# Altium PCB circuit_pcb.PcbDoc
Units mm, origin at the board's own origin, x right, y up, seen from the top; angles counter-clockwise.
Board outline 64.75 x 28.13 mm, 2 copper layers (Top Layer, Bottom Layer); 18 components, 158 nets, 67 pads, 22 vias.
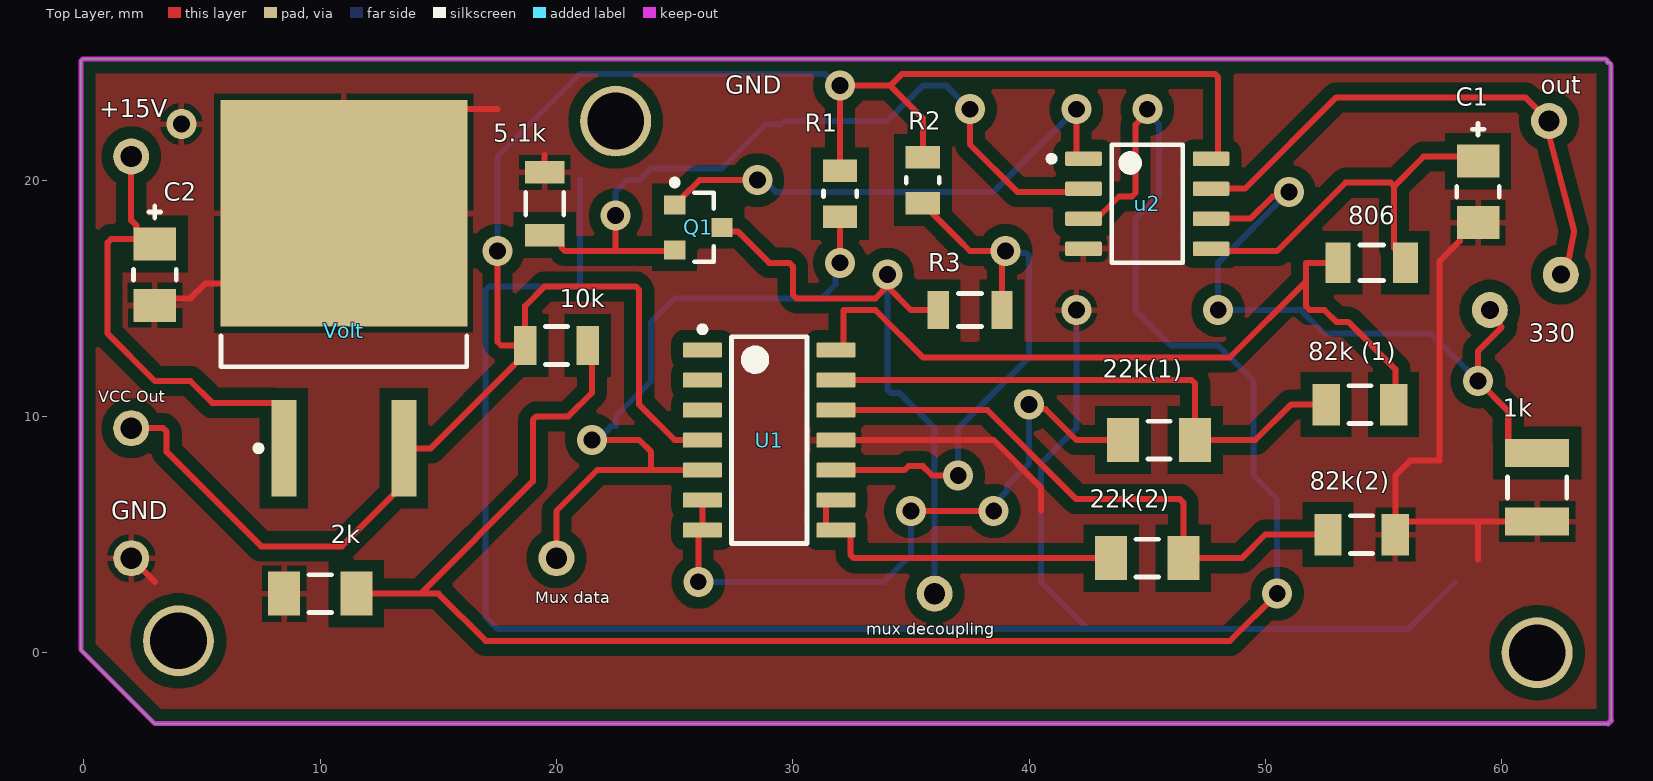
[diagram p0: Top Layer view]
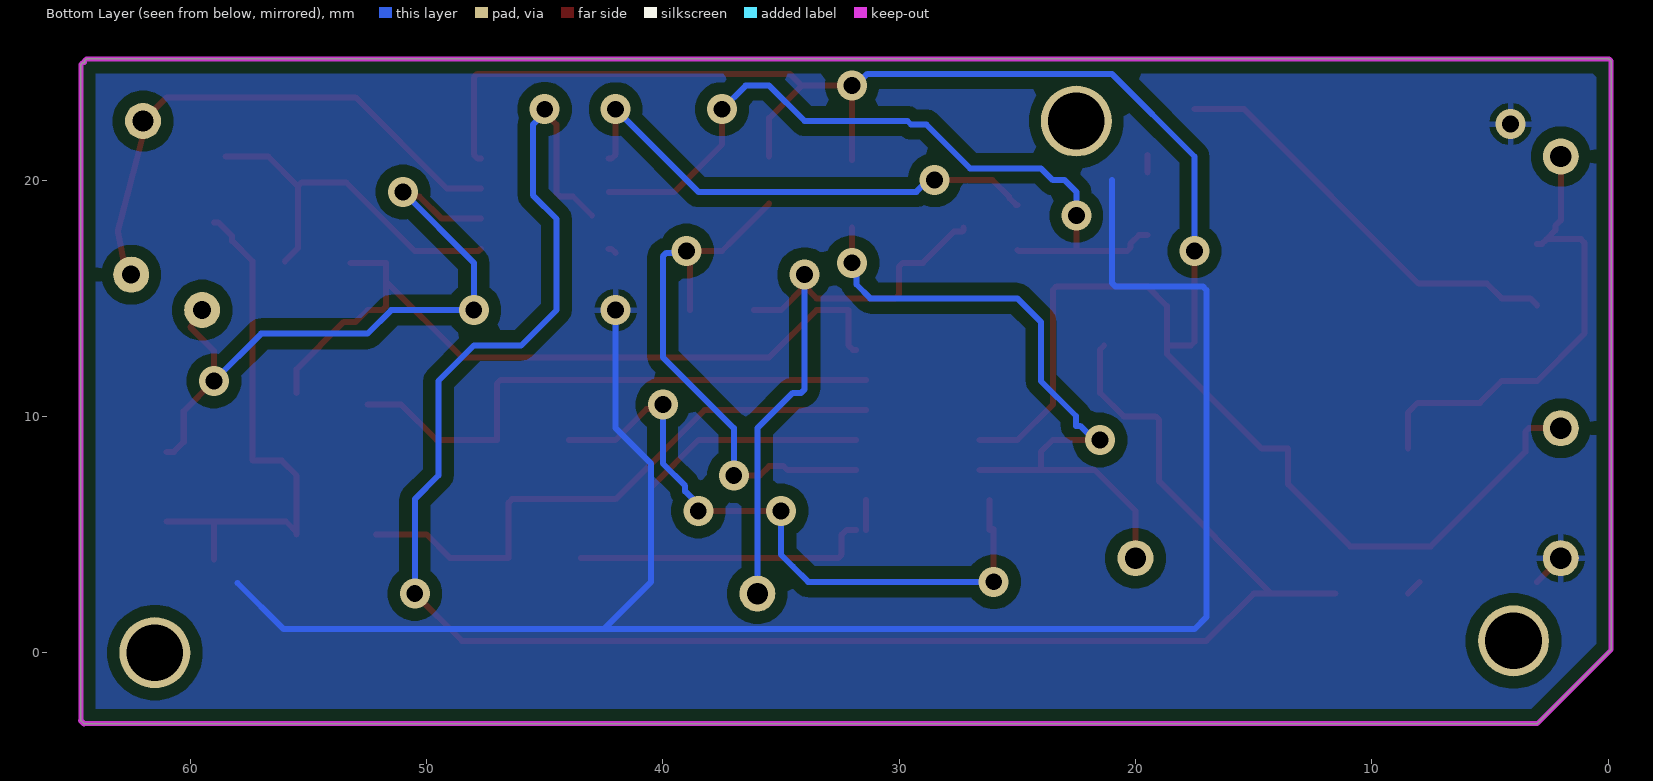
[diagram p1: Bottom Layer view, seen from below]
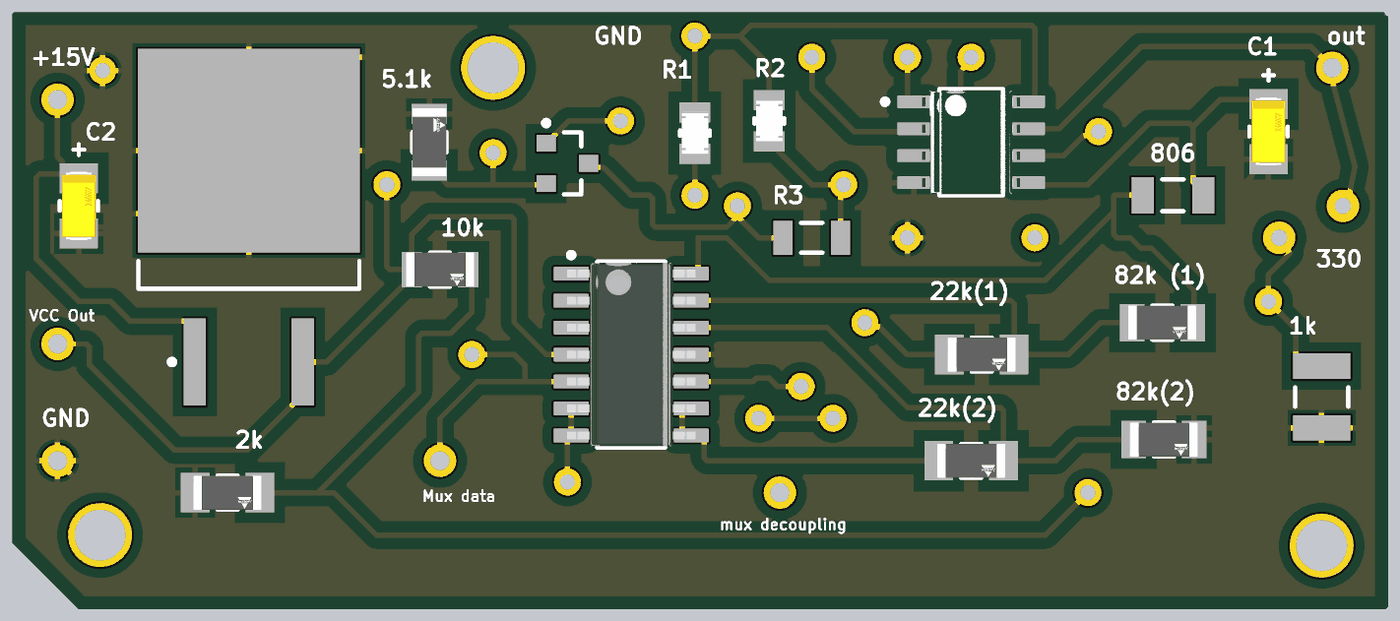
[diagram p2: 3D render of the assembled board from above, using the file's embedded part models]

## Layer stack, top to bottom
Top Solder: solder mask 0.0102, Solder Resist, Dk 3.5
Top Layer: signal copper 0.0356
Dielectric 1: dielectric 0.32, FR-4, Dk 4.8
Bottom Layer: signal copper 0.0356
Bottom Solder: solder mask 0.0102, Solder Resist, Dk 3.5

## Board outline
-0.127,0.127 -0.127,25 cw(c0,25) 0,25.127 64.351,25.127 cw(c64.351,25) 64.479,25 64.476,24.976 cw(c64.5,24.851) 64.627,24.851 64.627,-2.873 64.5,-3 3,-3

## Design rules (kind name [scope] priority, off if disabled: settings)
Clearance 5_1 [InNamedPolygon('GND_L01_P003')] p1: gap=0.512 ignorepadtopadclearanceinfootprint=FALSE
Clearance 512 [InNamedPolygon('GND_L02_P001')] p2: gap=0.512 ignorepadtopadclearanceinfootprint=FALSE
Clearance Clearance_1 [InNamedPolygon('GND_L02_P001')] p3: gap=0.254 ignorepadtopadclearanceinfootprint=FALSE except(0: Arc-Hole Track-Hole SMDPad-Hole THPad-Hole Via-Hole Fill-Hole Poly-Hole Region-Hole Text-Hole)
Clearance "top gnd" [InNamedPolygon('GND_L01_P003')] p4: gap=0.4 ignorepadtopadclearanceinfootprint=FALSE
Clearance [All] p5 off: gap=0.4 ignorepadtopadclearanceinfootprint=FALSE
PolygonConnect [All] p1: connectstyle=Relief reliefconductorwidth=0.254 reliefentries=4 polygonreliefangle="90 Angle" airgapwidth=0.254
RoutingVias [All] p1: holewidth=0.711 width=1.27 viastyle="Through Hole" minholewidth=0.711 minwidth=1.27 maxholewidth=0.711 maxwidth=1.27
SolderMaskExpansion [All] p1: expansion=0.102 istentingtop=FALSE
Width [All] p1: maxlimit=0.254 minlimit=0.254 preferedwidth=0.254
30 further rules are at their usual default settings.

## Components (designator, comment, footprint, x,y, rotation, side; value= is the part's Value field where it differs from the comment)
1k "CRCW12101K00FKEAHP" RESC3225X60X45NL20T20 61.5,7 r90 top
2k "CRCW12062K00FKEA" FP-CRCW1206-e3-IPC_A 10,2.5 r0 top
5.1k "CRCW12065K10FKEA" FP-CRCW1206-e3-IPC_C 19.5,19 r90 top
10k "CRCW120610K0FKEA" FP-CRCW1206-e3-IPC_C 20,13 r0 top
22k(1) "CRCW120622K0FKEA" FP-CRCW1206-e3-IPC_A 45.5,9 r0 top
22k(2) "CRCW120622K0FKEA" FP-CRCW1206-e3-IPC_A 45,4 r0 top
"82k (1)" "CRCW120682K0FKEA" FP-CRCW1206-e3-IPC_B 54,10.5 r0 top
82k(2) "CRCW120682K0FKEA" FP-CRCW1206-e3-IPC_B 54.074,5 r0 top
806 "RC1206FR-07806RL" RESC3116X65X40NL10T20 54.5,16.5 r0 top
C1 "TAJA106K016RNJ" FP-TAJA-MFG 59,19.5 r90 top
C2 "TAJA106K016RNJ" FP-TAJA-MFG 3,16 r90 top
Q1 "MGSF1N02LT1G" ONSC-SOT-23-3-318-08_V 26,18 r0 top
R1 "CRCW080540K0FKEA" FP-CRCW0805-e3-MFG 32,19.426 r90 top
R2 "CRCW080540K0FKEA" FP-CRCW0805-e3-MFG 35.5,20 r90 top
R3 "CRCW120615K0FKEA" RESC3216X60X45LL10T20 37.5,14.5 r0 top
U1 "LMH6683MA/NOPB" D0014A_M 29,9 r0 top
u2 "LM2904DR" FP-D0008A-MFG 45,19 r0 top
Volt "L7812CD2T-TR" TO-263_M 11,15 r90 top

## Footprints (in the part's own frame and the unit in brackets; to place one, negate y for a bottom-side part, rotate by r counter-clockwise, add the part's x,y. Pads: shape width x height; smd on the part's side, far side on the other; paste and mask are expansions set on the pad)
D0014A_M [mm] "SOIC, 14-Leads, Body 8.75x4mm, Pitch 1.27mm, IPC Low Density"
  rrect15% 1.65x0.65 smd: 1(-2.825,3.81) 2(-2.825,2.54) 3(-2.825,1.27) 4(-2.825,0) 5(-2.825,-1.27) 6(-2.825,-2.54) 7(-2.825,-3.81) 8(2.825,-3.81) 9(2.825,-2.54) 10(2.825,-1.27) 11(2.825,0) 12(2.825,1.27) 13(2.825,2.54) 14(2.825,3.81)
  silkscreen extent -2.95,-4.38 1.6,4.81, body extent -3.02,-4.32 3.02,4.32, height 1.59
FP-CRCW0805-e3-MFG [mm]
  rect 0.95x1.45 smd paste+0 mask+0: 1(-0.975,0) 2(0.975,0)
  silkscreen extent -0.12,-0.7 0.13,0.7, body extent -1.55,-0.82 1.55,0.82, height 0.25
FP-CRCW1206-e3-IPC_A [mm]
  rect 1.356x1.858 smd paste+0 mask+0: 1(-1.526,0) 2(1.526,0)
  silkscreen extent -0.47,-0.8 0.47,0.8, body extent -2.7,-1.43 2.7,1.43, height 0.25
FP-CRCW1206-e3-IPC_B [mm]
  rect 1.156x1.758 smd paste+0 mask+0: 1(-1.426,0) 2(1.426,0)
  silkscreen extent -0.47,-0.8 0.47,0.8, body extent -2.25,-1.13 2.25,1.13, height 0.25
FP-CRCW1206-e3-IPC_C [mm]
  rect 0.956x1.658 smd paste+0 mask+0: 1(-1.326,0) 2(1.326,0)
  silkscreen extent -0.47,-0.8 0.47,0.8, body extent -1.9,-0.97 1.9,0.97, height 0.25
FP-D0008A-MFG [mm]
  rrect17% 1.55x0.6 smd paste+0 mask+0: 1(-2.7,1.905) 2(-2.7,0.635) 3(-2.7,-0.635) 4(-2.7,-1.905) 5(2.7,-1.905) 6(2.7,-0.635) 7(2.7,0.635) 8(2.7,1.905)
  silkscreen extent -4.17,-2.5 1.5,2.5, body extent -3.57,-2.75 3.57,2.75, height 0.25
FP-TAJA-MFG [mm]
  rect 1.4x1.8 smd paste+0 mask+0: 1(-1.3,0) 2(1.3,0)
  silkscreen extent -0.22,-0.9 2.9,0.9, body extent -2.1,-1 2.1,1, height 0.25
ONSC-SOT-23-3-318-08_V [mm] "SOT23, 3-Leads, Body 2.92x1.3mm, Pitch 0.95mm"
  rect 0.9x0.8 smd: 1(-1,0.95) 2(-1,-0.95) 3(1,0)
  silkscreen extent -1.12,-1.46 0.65,2.02, body extent -0.65,-1.46 0.65,1.46, height 1.11
RESC3116X65X40NL10T20 [mm] "Chip Resistor, 2-Leads, Body 3.10x1.60mm, IPC Medium Density"
  rect 1.05x1.7 smd: 1(-1.425,0) 2(1.425,0)
  silkscreen extent -0.5,-0.75 0.5,0.75, body extent -1.6,-0.85 1.6,0.85, height 0.65
RESC3216X60X45LL10T20 [mm] "Chip Resistor, 2-Leads, Body 3.20x1.60mm, IPC High Density"
  rect 0.9x1.6 smd: 1(-1.35,0) 2(1.35,0)
  silkscreen extent -0.5,-0.7 0.5,0.7, body extent -1.65,-0.85 1.65,0.85, height 0.6
RESC3225X60X45NL20T20 [mm] "Chip Resistor, 2-Leads, Body 3.20x2.50mm, IPC Medium Density"
  rect 1.2x2.7 smd: 1(-1.45,0) 2(1.45,0)
  silkscreen extent -0.45,-1.25 0.45,1.25, body extent -1.7,-1.35 1.7,1.35, height 0.6
TO-263_M [mm] "D2-PAK, 4-Leads, Body 9.2x10.2mm, Pitch 2.54mm, Lead Span 15.4mm, IPC Low Density"
  rect 4.1x1.05 smd: 1(-6.35,2.54) 3(-6.35,-2.54)
  rect 9.6x10.45 smd: 4(3.6,0)
  silkscreen extent -6.47,-5.2 -1.6,5.2, body extent -2.9,-5.2 6.45,5.2, height 4.6

## Part data
1k: library part CMP-2005-00195-1, Manufacturer="Vishay Dale", Part Number=CRCW12101K00FKEAHP
2k: library part CMP-1014-00542-3, "RES Thick Film, 2kΩ, 1%, 0.25W, 100ppm/°C, 1206", Case Code (Imperial)=1206, Case Code (Metric)=3216, Max Operating Temperature=155°C, Max Power Dissipation=250mW, Min Operating Temperature=-55°C, Package Quantity=10, Resistance=2kR, Temperature Coefficient=100ppm/°C, Tolerance=1%, Voltage Rating=200V, Case/Package=1206, Composition="Thick Film", Contact Plating=Tin, Depth=1.6mm, Features="Automotive AEC-Q200", Height=0.55mm, Length=3.2mm, Military Standard=Not, Mount="Surface Mount", Number of Pins=2, Number of Terminations=2, Packaging="Tape and Reel", Power Rating=250mW, Radiation Hardening=No, Termination=SMD/SMT, Weight=0.000353oz, Width=1.6mm
5.1k: library part CMP-1014-00590-3, "RES Thick Film, 5.1kΩ, 1%, 0.25W, 100ppm/°C, 1206", Case Code (Imperial)=1206, Case Code (Metric)=3216, Max Operating Temperature=155°C, Max Power Dissipation=250mW, Min Operating Temperature=-55°C, Package Quantity=10, Resistance=5.1kR, Temperature Coefficient=100ppm/°C, Tolerance=1%, Voltage Rating=200V, Case/Package=1206, Composition="Thick Film", Contact Plating=Tin, Depth=1.6mm, Features="Automotive AEC-Q200", Height=0.55mm, Lead Free="Lead Free", Length=3.2mm, Military Standard=Not, Number of Terminations=2, Packaging="Tape and Reel", Power Rating=250mW, Radiation Hardening=No, Termination=SMD/SMT, Voltage Rating (DC)=200V, Weight=0.000353oz, Width=1.6mm
10k: library part CMP-2003-04807-2, "RES Thick Film, 10kΩ, 1%, 0.25W, 100ppm/°C, 1206", Case Code (Imperial)=1206, Case Code (Metric)=3216, Max Operating Temperature=155°C, Max Power Dissipation=250mW, Min Operating Temperature=-55°C, Package Quantity=10, Resistance=10kR, Temperature Coefficient=100ppm/°C, Tolerance=1%, Voltage Rating=200V, Case/Package=1206, Composition="Thick Film", Contact Plating=Tin, Depth=1.6mm, Features="Automotive AEC-Q200", Height=0.55mm, Lead Free="Lead Free", Length=3.2mm, Military Standard=Not, Number of Pins=2, Number of Terminations=2, Packaging="Tape and Reel", Power Rating=250mW, Radiation Hardening=No, Termination=SMD/SMT, Voltage Rating (DC)=200V, Weight=0.000353oz, Width=0.063inch, Working Voltage=200V
22k(1) 22k(2): library part CMP-2003-01962-2, "RES Thick Film, 22kΩ, 1%, 0.25W, 100ppm/°C, 1206", Case Code (Imperial)=1206, Case Code (Metric)=3216, Max Operating Temperature=155°C, Max Power Dissipation=250mW, Min Operating Temperature=-55°C, Package Quantity=10, Resistance=22kR, Temperature Coefficient=100ppm/°C, Tolerance=1%, Voltage Rating=200V, Case/Package=1206, Composition="Thick Film", Contact Plating=Tin, Depth=1.6mm, Features="Automotive AEC-Q200", Height=0.55mm, Lead Free="Lead Free", Length=3.2mm, Military Standard=Not, Number of Terminations=2, Packaging="Tape and Reel", Power Rating=250mW, Radiation Hardening=No, Termination=SMD/SMT, Voltage Rating (DC)=200V, Weight=0.000353oz, Width=0.063inch
"82k (1)" 82k(2): library part CMP-2003-02402-2, "RES Thick Film, 82kΩ, 1%, 0.25W, 100ppm/°C, 1206", Case Code (Imperial)=1206, Case Code (Metric)=3216, Max Operating Temperature=155°C, Max Power Dissipation=250mW, Min Operating Temperature=-55°C, Package Quantity=10, Resistance=82kR, Temperature Coefficient=100ppm/°C, Tolerance=1%, Voltage Rating=200V, Case/Package=1206, Composition="Thick Film", Contact Plating=Tin, Depth=1.6mm, Features="Automotive AEC-Q200", Height=0.55mm, Lead Free="Lead Free", Length=3.2mm, Military Standard=Not, Number of Pins=2, Number of Terminations=2, Packaging="Tape and Reel", Power Rating=250mW, Radiation Hardening=No, Termination=SMD/SMT, Voltage Rating (DC)=200V, Weight=0.000353oz, Width=0.063inch, Working Voltage=200V
806: library part CMP-2003-03876-1, Manufacturer=Yageo, Part Number=RC1206FR-07806RL
C1 C2: library part CMP-1661-00004-2, "10uF 16V  ±10% 3Ω 1206  SMD Tantalum Capacitor", Capacitance=10uF, Case Code (Imperial)=1206, Case Code (Metric)=3216, Dielectric Material=Tantalum, ESR (Equivalent Series Resistance)=3R, Leakage Current=1.6uA, Max Operating Temperature=125°C, Min Operating Temperature=-55°C, Package Quantity=1, Tolerance=10%, Voltage=16V, Case/Package=1206, Depth=1.6mm, Dissipation Factor=8%, Features="General Purpose", Height=1.6mm, Height - Seated (Max)=0.071inch, Lead Free="Lead Free", Lead Pitch=1.1mm, Length=3.2mm, Mount="Surface Mount", Number of Pins=2, Packaging="Tape and Reel", Polarity=Polar, Radiation Hardening=No, REACH SVHC="No SVHC", Termination=SMD/SMT, Voltage Rating=16V, Voltage Rating (DC)=16V, Width=1.6mm
Q1: library part CMP-1058-00777-1, "Power MOSFET, 750 mA, 20 V, N-Channel, 3-Pin SOT-23, Pb-Free, Tape and Reel", Manufacturer="On Semiconductor", Package Type=SOT-23-3, Channel Polarity="N Channel", Ciss Typ (pF)=125, ComponentLink1Description="Manufacturer URL", ComponentLink1URL=http://www.onsemi.com/, ComponentLink2Description=Datasheet, ComponentLink2URL=http://www.onsemi.cn/pub_link/Collateral/MGSF1N02LT1-D.PDF, ComponentLink3Description="Package Specification", ComponentLink3URL=http://www.onsemi.cn/pub_link/Collateral/318-08.PDF, Configuration=Single, Coss Typ (pF)=120, Crss Typ (pF)=45, DatasheetVersion="Rev. 6", ID Max (A)=0.75, Mounting Technology="Surface Mount", PackageDescription="3-Pin Small Outline Transistor, Body 2.92 x 1.3 mm, Pitch 0.95 mm", PackageReference=SOT-23-3-318-08, PackageVersion="Rev. AP, 11/2009", Packing="Tape and Reel", PartNumber=MGSF1N02LT1G, PD Max (W)=0.4, RoHS=Pb-Free, V(BR)DSS Min (V)=20, VGS Max (V)=20, VGS(th) Max (V)=2.4
R1 R2: library part CMP-02407-003498-1, "RES Thick Film, 40kΩ, 1%, 0.125W, 100ppm/°C, 0805", Case/Package=0805, Max Operating Temperature=155°C, Max Power Dissipation=125mW, Min Operating Temperature=-55°C, Package Quantity=5000, Resistance=40kR, Temperature Coefficient=100ppm/°C, Tolerance=1%, Composition="Thick Film", Features="Automotive AEC-Q200", Height=0.02inch, Lead Free="Lead Free", Length=0.079inch, Number of Terminations=2, Packaging="Tape and Reel", Width=0.049inch
R3: library part CMP-2003-01817-1, Manufacturer="Vishay Dale", Part Number=CRCW120615K0FKEA
U1: library part CMP-0055-00500-3, "190MHz Single Supply, Dual and Triple Operational Amplifiers, 14-pin Narrow SOIC, Pb-Free", Manufacturer="Texas Instruments", Package Reference=D0014A, PackageTopMarking=NSUZXYTTE#*LMH66*83MA, PowerWise=N, Code_IPC=SOIC127P600-14, Code_JEDEC=MS-012AB, ComponentLink1Description="Datasheet URL", ComponentLink1URL=http://www.ti.com/general/docs/lit/getliterature.tsp?genericPartNumber=LMH6683&fileType=pdf, CompType=Amplifiers, PackageDescription="Molded Package S.O., .150in Wide, 14 Lead", PinCount=14, RoHS=Y
u2: library part CMP-04895-000052-2, "IC OPAMP GP 2 CIRCUIT 8SOIC", Ambient Temperature Range High=+125°C, Ambient Temperature Range Low=-40°C, Input Bias Current=-0.02uA, Input Offset Voltage=3mV, Manufacturer="Texas Instruments", Max Dual Supply Voltage=13V, Max Junction Temp=+150°C, Max Supply Voltage=26V, Min Dual Supply Voltage=1.5V, Min Supply Voltage=3V, Nominal Supply Current=350-500uA, Output Current per Channel=20mA, Package=D0008A, Temperature="-40°C to +125°C", Voltage Gain=100V/mV, Automotive=No, Category=IC, ComponentLink2Description=Datasheet, ComponentLink2URL=https://www.ti.com/lit/ds/symlink/lm2904.pdf, Device Class L1="Integrated Circuits (ICs)", Device Class L2="Linear ICs", Device Class L3="Amplifiers - Op Amps", Digikey Description="IC OPAMP GP 2 CIRCUIT 8SOIC", Gain Bandwidth=0.7MHz, Height=1.75mm, Lead Free=Yes, Manufacturer Part Number=LM2904DR, Mouser Description="Operational Amplifiers - Op Amps Dual GP Op Amp", Number of Channels=2, Octopart=https://octopart.com/lm2904dr-texas+instruments-409181, RoHS=TRUE, Standoff Height=0.11mm, Temperature Range High=+125°C, Temperature Range Low=-40°C
Volt: library part CMP-0244-00182-1, "Positive Voltage Regulator, 3-Pin D2PAK, Tape and Reel", ComponentLink1Description="Manufacturer URL", ComponentLink1URL=http://www.st.com, ComponentLink2Description=Datasheet, ComponentLink2URL=http://www.st.com/internet/com/TECHNICAL_RESOURCES/TECHNICAL_LITERATURE/DATASHEET/CD00000444.pdf, DatasheetVersion=16/11/2011, PackageDescription="3-Pin Transistor Outline Package 2.54 mm Pitch, 15.4 mm Lead Span (D2PAK)", PackageReference=TO-263, PackageVersion=2011

## Free pads (board coordinates)
  round 1.524 hole 0.9: 5(36,2.5) 7(2,9.5) +(2,21) -(2,4) mux_data(20,4) "V out+"(62,22.5)
  round 1.524 hole 0.762: 12(59.5,14.5) 13(62.5,16)
  round 3 hole 2.4: 14(4,0.5) 14(22.5,22.5) 14(61.5,0)

## Via types
v1: diameter 1.27, hole 0.711, Top Layer to Bottom Layer, 22 vias

## Nets (pads, with @x,y where several pads share a name; then routed paths per layer and width w, separated by ;. In a path a pad name is that pad's centre, name@x,y a point inside that pad or via, vN(x,y) a via of type N, cw(c..) or ccw(c..) an arc to the next point about the centre after c; other vN are vias at no path point)
GND: 1k.1 2k.1 5.1k.2 82k(2).2 C1.1 C2.1 pad.- U1.11 u2.4 Volt.4 | length 133.7
  Top Layer w0.254: pad.- 3,3 ; C2.1 3.3,15 4.5,15 5.125,15.625 8.025,15.625 15.4,23 17.5,23 ; 2k.1@7.974,3 2k.1 ; 5.1k.2 19.5,21.055 ; U1.11 38.5,9 40.5,7 40.5,6 ; u2.4@42,16.922 42.173,17.095 u2.4 ; 55.5,5 55.5,5.099 ; 59,3.95 59,5.5 ; C1.1 58.8,18.2 58.227,17.627 58.227,17.427 57.375,16.575 57.375,8.125 56.125,8.125 55.5,7.5 55.5,5.099 ; 1k.1@61,5.55 55.951,5.55 55.5,5.099
  Bottom Layer w0.254: 21,20 21,15.649 20.851,15.5 17.149,15.5 17,15.351 17,1.5 17.5,1 42.5,1 ; v1(42,14.5) 42,9.5 40.5,8 40.5,6 40.5,3 42.5,1 ; 58,2.95 56.05,1 42.5,1
  other v1: 4.127,22.373
Net1_1: 
Net1_2: 
Net1k_2: 1k.2 pad.12 u2.6 | length 29.8
  Top Layer w0.254: u2.6 49.365,18.365 50.306,19.306 50.806,19.306 v1(51,19.5) ; pad.12 60,13.775 59,12.775 v1(59,11.5) 60.277,10.223 60.277,8.923 60.7,8.5 1k.2@61,8.5
  Bottom Layer w0.254: v1(51,19.5) 48,16.5 v1(48,14.5) 51.5,14.5 52.5,13.5 57,13.5 v1(59,11.5)
Net2_1: 
Net2_2: 
Net2k_2: 2k.2 10k.2 u2.3 | length 85.4
  Top Layer w0.254: 2k.2 14.25,2.5 ; 10k.2 21.5,12.826 21.5,11 20.5,10 19.149,10 19,9.851 19,7.25 14.25,2.5 ; u2.3@43,18.5 43.806,19.306 44.351,19.306 44.5,19.454 44.5,22.343 45,22.843 v1(45,23) ; v1(50.5,2.5) 48.5,0.5 17,0.5 15,2.5 14.25,2.5
  Bottom Layer w0.254: v1(45,23) 45,22.843 45.5,22.343 45.5,19.363 44.5,18.363 44.5,14.5 46,13 48,13 49.5,11.5 49.5,7.5 50.5,6.5 v1(50.5,2.5)
Net3_1: 
Net3_2: 
Net4_1: 
Net4_2: 
Net5.1k_1: 5.1k.1 Q1.2 u2.2 | length 32.8
  Top Layer w0.254: 5.1k.1 19.851,17.674 20.202,17.323 20.202,17.149 20.351,17 22.5,17 ; v1(22.5,18.5) 22.5,17 ; Q1.2 24.95,17 22.5,17 ; v1(37.5,23) 37.5,21.5 39.5,19.5 u2.2@42.274,19.5
  Bottom Layer w0.254: v1(22.5,18.5) 22.5,19.5 23,20 23.5,20 24,20.5 27,20.5 28.851,22.351 29.5,22.351 29.649,22.5 34,22.5 35.5,24 36.5,24 v1(37.5,23)
Net5_1: 
Net5_2: 
Net6_1: 
Net6_2: 
Net7_1: 
Net7_2: 
Net8_1: 
Net8_2: 
Net9_1: 
Net9_2: 
Net10_1: 
Net10_2: 
Net11_1: 
Net11_2: 
Net12_1: 
Net12_2: 
Net13_1: 
Net13_2: 
Net14_1: 
Net14_2: 
Net15_1: 
Net15_2: 
Net16_1: 
Net16_2: 
Net17_1: 
Net17_2: 
Net18_1: 
Net18_2: 
Net19_1: 
Net19_2: 
Net20_1: 
Net20_2: 
Net21_1: 
Net21_2: 
Net22_1: 
Net22_2: 
Net22k(1)_1: 22k(1).1 U1.6 U1.7 | length 28
  Top Layer w0.254: v1(26,3) U1.7@26,5.231 ; U1.7 U1.6 ; v1(35,6) v1(38.5,6) ; v1(40,10.5) 40.194,10.306 40.694,10.306 42,9 43.974,9
  Bottom Layer w0.254: v1(26,3) 33.851,3 34.5,3.649 35,4.149 v1(35,6) ; v1(38.5,6) 38.5,6.275 39.054,6.829 39.054,7.062 40,8.008 v1(40,10.5)
Net22k(1)_2: 22k(1).2 "82k (1).1" U1.13 | length 24.2
  Top Layer w0.254: U1.13@31.4,11.54 U1.13 46.877,11.54 47.026,11.391 47.026,9 49.574,9 51.074,10.5 52.5,10.5
Net22k(2)_1: 22k(2).1 U1.8 U1.9 | length 13.9
  Top Layer w0.254: U1.8@31.4,5.19 U1.9@31.4,6.46 ; U1.8 32.238,5.19 32.436,4.992 32.436,4.149 32.585,4 43.474,4
Net22k(2)_2: 22k(2).2 82k(2).1 U1.12 | length 25.1
  Top Layer w0.254: U1.12@31.4,10.27 38.23,10.27 42,6.5 46.377,6.5 46.526,6.351 46.526,4 49,4 50,5 52.148,5
Net23_1: 
Net23_2: 
Net24_1: 
Net24_2: 
Net25_1: 
Net25_2: 
Net26_1: 
Net26_2: 
Net27_1: 
Net27_2: 
Net28_1: 
Net28_2: 
Net29_1: 
Net29_2: 
Net30_1: 
Net30_2: 
Net31_1: 
Net31_2: 
Net32_1: 
Net32_2: 
Net33_1: 
Net33_2: 
Net34_1: 
Net34_2: 
Net35_1: 
Net35_2: 
Net36_1: 
Net36_2: 
Net37_1: 
Net37_2: 
Net38_1: 
Net38_2: 
Net39_1: 
Net39_2: 
Net40_1: 
Net40_2: 
Net41_1: 
Net41_2: 
Net42_1: 
Net42_2: 
Net43_1: 
Net43_2: 
Net44_1: 
Net44_2: 
Net45_1: 
Net45_2: 
Net46_1: 
Net46_2: 
Net47_1: 
Net47_2: 
Net48_1: 
Net48_2: 
Net49_1: 
Net49_2: 
Net50_1: 
Net50_2: 
Net51_1: 
Net51_2: 
Net52_1: 
Net52_2: 
Net53_1: 
Net53_2: 
Net54_1: 
Net54_2: 
Net55_1: 
Net55_2: 
Net56_1: 
Net56_2: 
Net57_1: 
Net57_2: 
Net58_1: 
Net58_2: 
Net59_1: 
Net59_2: 
"Net82k (1)_2": 806.1 "82k (1).2" U1.14 | length 32.9
  Top Layer w0.254: U1.14 31.951,12.81 32.149,13.008 32.149,14.5 33.5,14.5 35.5,12.5 48.5,12.5 51.724,15.724 ; 806.1@53.224,16.5 51.724,16.5 51.724,15.724 ; 55.5,11 55.5,12 53.5,14 53,14 52.5,14.5 51.873,14.5 51.724,14.649 51.724,15.724
Net333_2: "pad.V out+" pad.13 u2.7 | length 23.1
  Top Layer w0.254: u2.7 49.135,19.635 53,23.5 61,23.5 62,22.5 61.942,22.401 61.908,22.341 61.908,22.273 61.908,22.24 63.063,17.872 63.063,17.814 63.058,17.789 62.736,16.182 62.664,16.109 62.643,16.095 pad.13
Net806_2: 806.2 C1.2 u2.5 | length 16
  Top Layer w0.254: u2.5 47.795,17 50.5,17 53.388,19.888 55.302,19.888 55.444,19.746 ; 806.2@56,16.564 55.444,17.12 55.444,19.746 ; C1.2@58.5,21 56.698,21 55.444,19.746
NetC2_2: C2.2 pad.+ Volt.1 | length 20.1
  Top Layer w0.254: pad.+ 2,18.3 2.227,18.073 2.227,17.873 C2.2@2.6,17.5 ; C2.2 2.8,17.3 C2.2@2.6,17.5 ; Volt.1 8.46,10.175 8.062,10.573 5.427,10.573 4.5,11.5 3,11.5 1,13.5 1,17.351 1.149,17.5 C2.2@2.6,17.5
Netextra3_1: 
Netextra3_2: 
Netextra4_1: 
Netextra4_2: 
Netextra5_1: 
Netextra5_2: 
"Netextra 1_1": 
"Netextra 1_2": 
"Netextra 2_1": 
"Netextra 2_2": 
NetQ1_1: Q1.1 u2.1 | length 21.4
  Top Layer w0.254: Q1.1 25.05,18.95 25.323,19.223 25.323,19.273 26.05,20 v1(28.5,20) ; v1(42,23) 42,21.078 42.173,20.905 u2.1
  Bottom Layer w0.254: v1(28.5,20) 28.775,20 29.275,19.5 38.5,19.5 v1(42,23)
NetQ1_3: pad.5 Q1.3 R3.1 | length 26.6
  Top Layer w0.254: Q1.3@27.27,18 27.27,17.871 27.323,17.818 27.682,17.818 29,16.5 29.851,16.5 30,16.351 30,15.149 30.149,15 33.5,15 v1@34,15.5 ; v1(34,16) v1@34,15.5 ; R3.1 35,14.5 v1@34,15.5
  Bottom Layer w0.254: v1(34,16) 34,11.149 34.149,11 34.5,11 36,9.5 pad.5
NetR1_1: pad.mux_data R1.1 U1.5 | length 30
  Top Layer w0.254: pad.mux_data 20,6 21.73,7.73 24,7.73 ; v1(21.5,9) 23.5,9 24,8.5 24,7.73 ; U1.5@26.6,7.73 24,7.73 ; v1(32,16.5) R1.1@32,18
  Bottom Layer w0.254: v1(21.5,9) 21.736,9 22.336,9.6 22.516,9.6 22.516,10.016 24,11.5 24,14 25,15 31.225,15 31.806,15.581 31.806,16.306 v1(32,16.5)
NetR2_1: R2.1 R3.2 U1.10 | length 23.8
  Top Layer w0.254: U1.10 34.73,7.73 34.895,7.895 35.5,7.895 35.895,7.5 v1(37,7.5) ; R2.1@35.5,19 37,17.5 37.5,17 v1@38.851,17 ; R3.2 R3.2 v1@38.851,17 ; v1(39,17) v1@38.851,17
  Bottom Layer w0.254: v1(37,7.5) 37,9.5 40,12.5 40,16.774 39.851,16.922 39.078,16.922 v1(39,17)
NetRes800_2: 
NetU3_1: 
NetU4_1: 
NetU4_10: 
NetU4_11: 
NetU4_13: 
NetU4_14: 
NetU5_1: 
NetU6_1: 
NetU7_1: 
NetU8_1: 
NetU9_1: 
NetU10_1: 
VCC: 10k.1 pad.7 R1.2 R2.2 U1.4 u2.8 Volt.3 | length 91.2
  Top Layer w0.254: pad.7 3.351,9.5 3.5,9.351 3.5,8.5 7.5,4.5 10.915,4.5 13.54,7.125 Volt.3 14.675,8.65 18.674,12.649 10k.1 ; v1(17.5,17) 17.5,13.149 17.649,13 10k.1 ; U1.4@26.6,9 U1.4 25,9 23.5,10.5 23.5,15.351 23.351,15.5 19.5,15.5 18.674,14.674 10k.1 ; R1.2@32,20.852 v1(32,24) 34.125,24 ; R2.2@35.5,21 35.5,22.625 34.125,24 ; u2.8 47.827,20.905 48,21.078 48,24.351 47.851,24.5 34.625,24.5 34.125,24
  Bottom Layer w0.254: v1(17.5,17) 17.5,21 21,24.5 31.343,24.5 31.843,24 v1(32,24)
pads on no net: U1.1 U1.2 U1.3

## Polygon pours and split planes (outlines as drawn)
GND on Bottom Layer "GND_L02_P001" (solid, pour order 1): 0.5,-0.5 3,-3 64,-3 64,24.5 0.649,24.5 0.5,24.351
GND on Top Layer "GND_L01_P003" (solid, pour order 3): 0,0 3,-3 64.5,-3 64.5,0 ccw(c64.49,0.137) 64.627,0.149 64.627,24.851 ccw(c64.5,24.851) 64.476,24.976 64.479,25 ccw(c64.351,25) 64.351,25.127 0,25.127 ccw(c0,25) -0.127,25

## Keep-outs
Keep-Out Layer:
  lines w0.2: 64.5,-3 61.479,-3 3,-3 -0.127,0.127 -0.127,2.627 -0.127,25 cw(c0,25) 0,25.127 64.351,25.127 cw(c64.351,25) 64.479,25 64.476,24.976 cw(c64.5,24.851) 64.627,24.851 64.627,0.149 64.627,-2.873
  lines w0.254: 64.5,-3 64.627,-2.873

## Silkscreen, mask and mechanical layers (free items; w line width, h text height)
Top Overlay:
  text "GND" at 27.15,23.65 h0.75
  text "out" at 61.65,23.65 h0.75
  text "+15V" at 0.65,22.65 h0.75
  text "330" at 61.15,13.15 h0.75
  text "VCC Out" at 0.6,10.6 h0.5
  text "GND" at 1.15,5.65 h0.75
  text "Mux data" at 19.1,2.1 h0.5
  text "mux decoupling" at 33.1,0.767 h0.5